# EAGLE board satshakit-grbl (EAGLE 8.4.3)
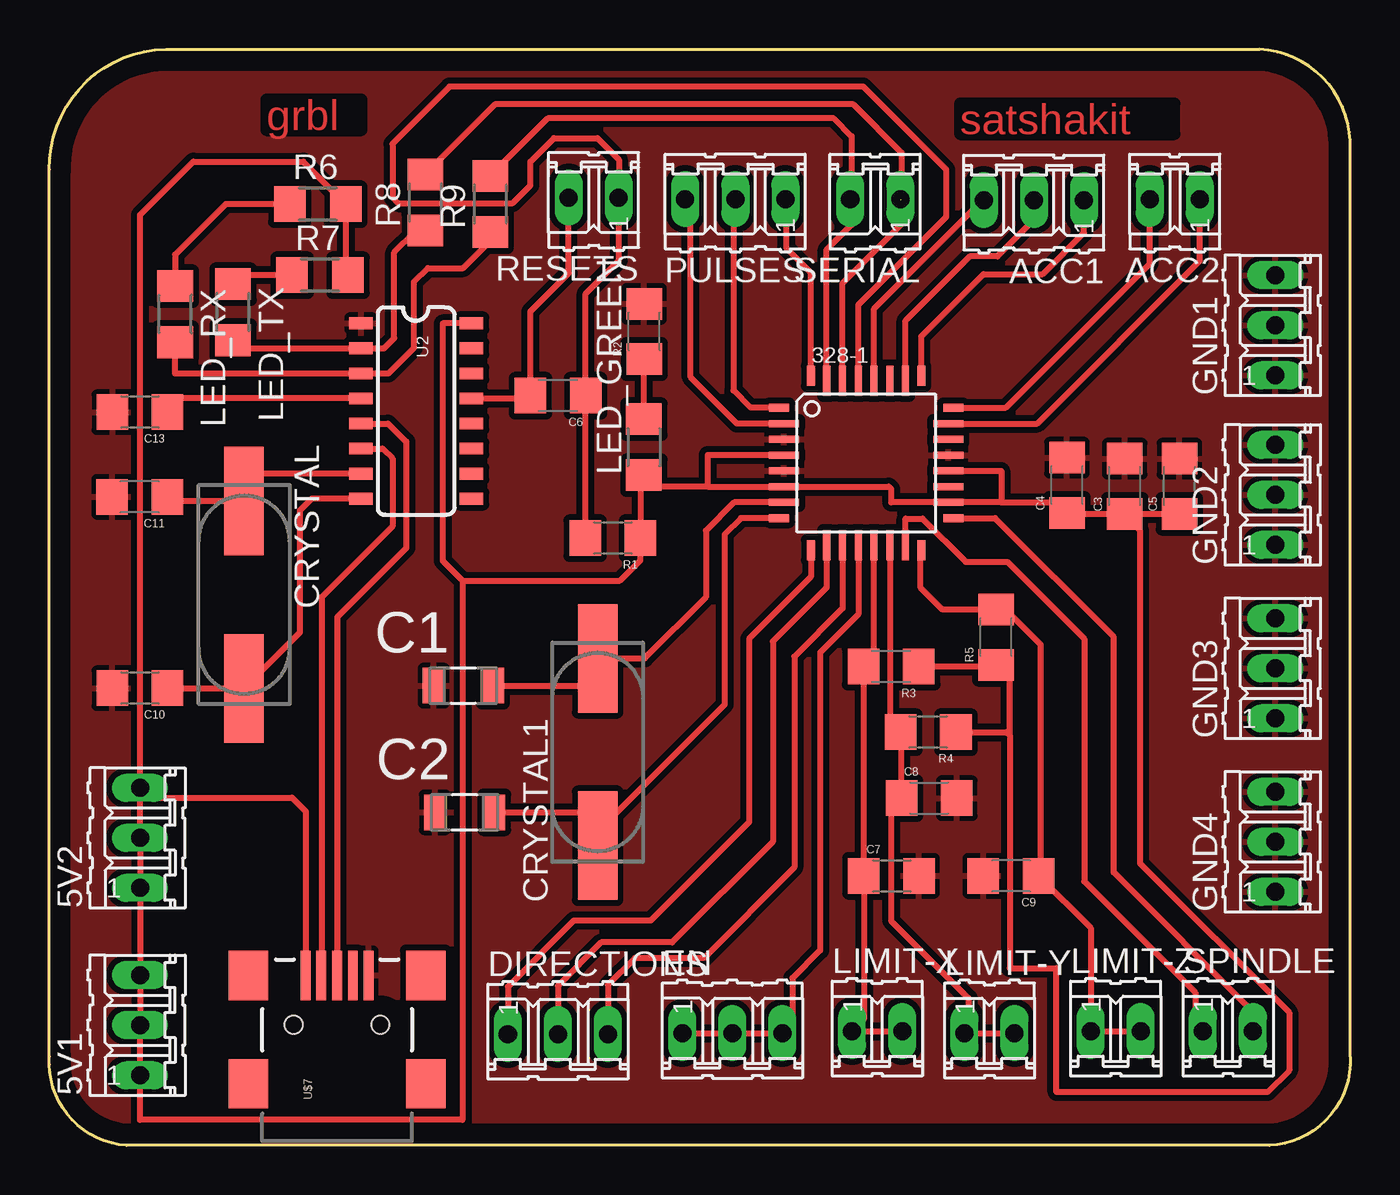
[diagram p0: board, top side]

Size 66.01 x 55.6 mm. Coordinates in mm from the lower left corner, seen from the top.
Outline: 3.91,0 arc-90 0.01,4.5 0.01,49.5 arc-90 5.91,55.6 61.41,55.6 arc-90 66.01,50.5 66.01,4.5 arc-90 61.91,0 3.91,0
Copper layers (1*16): Top 0.035mm / dielectric 1.5mm / Bottom 0.035mm
Design rules "default": minimum track width 10mil, minimum drill 24mil, track to track 8mil, track to pad 8mil, pad to pad 8mil, via to via 8mil, smd to smd 8mil, copper to edge 40mil, drill to drill 8mil, minimum pad ring 10mil, minimum via ring 8mil, stop-mask expansion 4mil, vias tented up to drill 0mil, thermal gap 10mil
tKeepout: 8 lines
bKeepout: 8 lines

## Footprints (pad centres in the part's own frame; a part is rotated, then mirrored left to right if it is on the bottom)
03P = drill 0.914 long: 1 -2.54,0; 2 0,0; 3 2.54,0
TQFP32-08 = smd 1.016 x 0.406: 1 -4.42,2.8; 8 -4.42,-2.8; 17 4.42,-2.8; 24 4.42,2.8 | smd 1.524 x 0.356: 2 -4.166,2; 3 -4.166,1.2; 4 -4.166,0.4; 5 -4.166,-0.4; 6 -4.166,-1.2; 7 -4.166,-2; 18 4.166,-2; 19 4.166,-1.2; 20 4.166,-0.4; 21 4.166,0.4; 22 4.166,1.2; 23 4.166,2 | smd 0.406 x 1.016: 9 -2.8,-4.42; 16 2.8,-4.42; 25 2.8,4.42; 32 -2.8,4.42 | smd 0.356 x 1.524: 10 -2,-4.166; 11 -1.2,-4.166; 12 -0.4,-4.166; 13 0.4,-4.166; 14 1.2,-4.166; 15 2,-4.166; 26 2,4.166; 27 1.2,4.166; 28 0.4,4.166; 29 -0.4,4.166; 30 -1.2,4.166; 31 -2,4.166
02P = drill 0.914 long: 1 -1.27,0; 2 1.27,0
CAPC3216X178N = smd 1.118 x 1.803: 1 -1.499,0; 2 1.499,0
1206 = smd 1.6 x 1.8: 1 -1.4,0; 2 1.4,0
CSM-7X-DU = smd 5.5 x 2: 1 -4.75,0; 2 4.75,0
1206' = smd 1.6 x 1.803: 1 -1.422,0; 2 1.422,0
LED1206 = smd 1.6 x 1.803: 1 -1.422,0; 2 1.422,0
R1206 = smd 1.6 x 1.803: 1 -1.422,0; 2 1.422,0
SO016 = smd 0.6 x 1.2: 1 -4.445,-2.8; 2 -3.175,-2.8; 3 -1.905,-2.8; 4 -0.635,-2.8; 5 0.635,-2.8; 6 1.905,-2.8; 7 3.175,-2.8; 8 4.445,-2.8; 9 4.445,2.8; 10 3.175,2.8; 11 1.905,2.8; 12 0.635,2.8; 13 -0.635,2.8; 14 -1.905,2.8; 15 -3.175,2.8; 16 -4.445,2.8
USB-MINIB = smd 2.5 x 0.5: D+ 2.5,0; D- 2.5,0.8; GND 2.5,-1.6; ID 2.5,-0.8; VBUS 2.5,1.6 | smd 2.5 x 2: MTN1 -3,4.5; MTN2 2.5,4.5; MTN3 -3,-4.5; MTN4 2.5,-4.5 | hole 0.9: 0,2.2; 0,-2.2

## Placement (x,y rotation side)
5V1  [03P]  4.61,6.1 90 top
5V2  [03P]  4.61,15.6 90 top
328-1  ATMEGA328P-AU  [TQFP32-08]  41.45,34.62 0 top
ACC1  [03P]  49.96,47.95 180 top
ACC2  [02P]  57.11,48 180 top
C1  18pF  [CAPC3216X178N]  21.01,23.32 0 top
C2  18pF  [CAPC3216X178N]  21.07,16.9 0 top
C3  10uF  [1206]  54.57,33.44 90 top
C4  1uF  [1206]  51.64,33.49 90 top
C5  100nF  [1206]  57.35,33.44 90 top
C6  100nF  [1206]  25.81,38.04 180 top
C7  100nF  [1206]  42.73,13.67 0 top
C8  100nF  [1206]  44.64,17.61 0 top
C9  100nF  [1206]  48.8,13.68 180 top
C10  18pF  [1206]  4.61,23.2 180 top
C11  18pF  [1206]  4.59,32.9 180 top
C13  10nF  [1206]  4.61,37.2 180 top
CRYSTAL  12MHZ  [CSM-7X-DU]  9.89,27.93 270 top
CRYSTAL1  16Mhz  [CSM-7X-DU]  27.83,19.95 90 top
DIRECTIONS  [03P]  25.81,5.65 0 top
EN  [03P]  34.66,5.7 0 top
GND1  [03P]  62.21,41.6 90 top
GND2  [03P]  62.21,33 90 top
GND3  [03P]  62.21,24.2 90 top
GND4  [03P]  62.21,15.4 90 top
LED_GREEN  [1206']  30.17,35.42 90 top
LED_RX  YELLOW  [LED1206]  6.39,42.16 270 top
LED_TX  YELLOW  [LED1206]  9.33,42.26 270 top
LIMIT-X  [02P]  42.01,5.8 0 top
LIMIT-Y  [02P]  47.71,5.7 0 top
LIMIT-Z  [02P]  54.11,5.8 0 top
PULSES  [03P]  34.81,48 180 top
R1  10k  [1206]  28.59,30.8 180 top
R2  499  [1206]  30.19,41.29 90 top
R3  4.7K  [1206]  42.72,24.28 180 top
R4  4.7K  [1206]  44.6,20.97 180 top
R5  4.7K  [1206]  48.04,25.78 90 top
R6  2K7  [R1206]  13.62,47.75 0 top
R7  2K7  [R1206]  13.74,44.15 0 top
R8  1K  [R1206]  19.07,47.84 90 top
R9  1K  [R1206]  22.37,47.75 90 top
RESETS  [02P]  27.62,48.08 180 top
SERIAL  [02P]  41.91,48 180 top
SPINDLE  [02P]  59.81,5.8 0 top
U2  CH340G  [SO016]  18.62,37.25 270 top
U$7  USB-MINIB-5PIN  [USB-MINIB]  14.6,6.13 90 top

## Library data of the parts
5V1 5V2 ACC1 ACC2 DIRECTIONS EN GND1-GND4 LIMIT-X LIMIT-Y LIMIT-Z PULSES RESETS SERIAL SPINDLE = con-amp-quick; OC_FARNELL: unknown; OC_NEWARK: unknown
328-1 = atmega8
C1 C2 = AVX_By_element14_Batch_1; MPN: 0612ZC225MAT2A; OC_FARNELL: -; OC_NEWARK: 12N3209; SUPPLIER: AVX; TOLERANCE: ±20%; VOLTAGERATING: 10V
C3-C11 C13 R1-R5 = 01_SparkFun
CRYSTAL = flight_controller.lbr01_FAB_Hello; OC_FARNELL: unknown; OC_NEWARK: unknown
CRYSTAL1 = 01_FAB_Hello; OC_FARNELL: unknown; OC_NEWARK: unknown
LED_GREEN = 01_FAB_Hello
LED_RX LED_TX R6-R9 = fab
U2 = SparkFun-DigitalIC; PROD_ID: IC-13498
U$7 = SparkFun

## Nets
5V: 5V1.1 5V1.2 5V1.3 5V2.1 5V2.2 5V2.3 328-1.4 328-1.6 328-1.18 328-1.20 C3.1 C4.1 C5.1 LED_GREEN.1 R1.1 R3.1 R4.1 R5.1 R6.2 R7.2 U2.16 U$7.VBUS
ABORT: 328-1.23 ACC2.1
COOLANT: 328-1.26 ACC1.2
DIRECTION-X: 328-1.9 DIRECTIONS.1
DIRECTION-Y: 328-1.10 DIRECTIONS.2
DIRECTION-Z: 328-1.11 DIRECTIONS.3
EN: 328-1.12 EN.1 EN.2 EN.3
FEEDHOLD: 328-1.24 ACC2.2
GND: 328-1.3 328-1.5 328-1.21 C1.1 C2.1 C3.2 C4.2 C5.2 C7.2 C8.2 C9.2 C10.2 C11.2 C13.2 GND1.1 GND1.2 GND1.3 GND2.1 GND2.2 GND2.3 GND3.1 GND3.2 GND3.3 GND4.1 GND4.2 GND4.3 R2.2 U2.1 U$7.GND
LIMIT-X: 328-1.13 C7.1 LIMIT-X.1 LIMIT-X.2 R3.2
LIMIT-Y: 328-1.14 C8.1 LIMIT-Y.1 LIMIT-Y.2 R4.2
LIMIT-Z: 328-1.16 C9.1 LIMIT-Z.1 LIMIT-Z.2 R5.2
N$1: U2.5 U$7.D+
N$2: 328-1.7 C1.2 CRYSTAL1.2
N$3: U2.6 U$7.D-
N$7: LED_RX.1 R6.1
N$8: LED_TX.1 R7.1
N$9: 328-1.8 C2.2 CRYSTAL1.1
N$26: LED_GREEN.2 R2.1
OSC_IN: C10.1 CRYSTAL.2 U2.8
OSC_OUT: C11.1 CRYSTAL.1 U2.7
PROBE: 328-1.28 ACC1.3
PULSE-X: 328-1.32 PULSES.1
PULSE-Y: 328-1.1 PULSES.2
PULSE-Z: 328-1.2 PULSES.3
RST: 328-1.29 C6.1 R1.2 RESETS.1
RST-FTDI: C6.2 RESETS.2 U2.13
RX-340: 328-1.31 R9.2 SERIAL.2
RXD: LED_RX.2 R9.1 U2.3
SPINDLE: 328-1.15 SPINDLE.1
SPINDLE-DIR: 328-1.17 SPINDLE.2
START-RESUME: 328-1.25 ACC1.1
TX-340: 328-1.30 R8.2 SERIAL.1
TXD: LED_TX.2 R8.1 U2.2
V3: C13.1 U2.4

## Tracks (layer width: path | path; a pad name or v marks a point on that pad's centre or on a via)
5V
  Top 0.254: 328-1.20 45,34.22 45,34.24
  Top 0.305: 328-1.18 | 328-1.20 | 45.61,32.59 328-1.18 | 328-1.20 45,34.24 | 37.97,33.42 328-1.6 | 328-1.18 42.72,32.62 42.72,33.3 42.6,33.42 328-1.6 | R3.1 47.84,24.28 R5.1 48.74,23.68 48.74,20.8 | R4.1 48.57,20.97 48.74,20.8 | 48.74,20.8 48.74,9 51.11,9 51.11,2.7 61.81,2.7 62.91,3.8 62.91,6.75 55.36,14.3 55.36,31.18 54.48,32.06 | 33.41,33.42 328-1.6 | 33.41,33.42 30.17,33.42 LED_GREEN.1 29.99,34 R1.1 29.99,29.68 28.96,28.65 20.96,28.65 | R6.2 15.09,47.7 | R6.2 15.05,44.26 R7.2 | R6.2 12.89,49.9 7.31,49.9 4.61,47.2 5V2.3 | U2.16 19.96,41.7 19.96,29.65 20.96,28.65 | 53.82,32.09 C3.1 | 54.22,31.69 C3.1 | 20.96,28.65 20.96,1.3 4.61,1.3 5V1.1 5V1.2 5V1.3 5V2.1 5V2.2 5V2.3 | U$7.VBUS 13.01,8.43 13.01,16.95 12.32,17.64 5.11,17.64 5V2.3 | 328-1.4 33.41,35.02 33.41,33.42 | 54.48,32.06 54.32,32.09 | 54.48,32.06 C3.1 | C3.1 C5.1 | C3.1 51.69,32.04 C4.1 51.11,32.62 48.31,32.62 | 48.31,32.62 328-1.18 | 328-1.20 48.31,34.22 48.31,32.62
ABORT
  Top 0.305: 328-1.23 50.13,36.62 58.38,44.87 ACC2.1
COOLANT
  Top 0.305: 328-1.26 43.45,41.84 46.71,45.1 48.11,45.1 49.96,46.95 ACC1.2
DIRECTION-X
  Top 0.305: 328-1.9 38.65,28.84 35.51,25.7 35.51,16.4 30.51,11.4 26.61,11.4 23.27,8.06 DIRECTIONS.1
DIRECTION-Y
  Top 0.305: 328-1.10 39.45,28.3 36.71,25.56 36.71,15.4 31.61,10.3 28.01,10.3 25.81,8.1 DIRECTIONS.2
DIRECTION-Z
  Top 0.305: 328-1.11 40.25,27.24 37.81,24.8 37.81,14.1 33.21,9.5 29.71,9.5 28.35,8.14 DIRECTIONS.3
EN
  Top 0.305: 41.07,30.45 328-1.12 41.05,26.94 39.11,25 39.11,9.9 37.7,8.49 37.7,6.2 EN.3 EN.2 EN.1
FEEDHOLD
  Top 0.305: 328-1.24 48.53,37.42 55.84,44.73 ACC2.2
GND
  Top 0.305: 328-1.5 | 328-1.21
  pour Top (isolate 0.305): 0.01,4.5 0.01,49.5 arc-90 5.01,55.6 62.01,55.6 arc-90 66.01,50.5 66.01,4.5 arc-90 61.81,0 3.81,0 arc-90
LIMIT-X
  Top 0.305: 328-1.13 41.85,24.28 R3.2 41.33,24.27 41.33,13.8 | 41.33,13.7 41.33,13.8 | 41.33,13.7 C7.1 41.33,6.39 LIMIT-X.1 LIMIT-X.2 | 41.94,13.19 41.33,13.8 | 41.54,13.49 41.33,13.7 | 41.24,13.61 41.33,13.7
LIMIT-Y
  Top 0.305: C8.1 43.24,20.93 R4.2 42.65,21.52 328-1.14 | 42.91,17.28 C8.1 | C8.1 42.71,17.08 42.71,11.4 46.64,7.47 46.64,5.9 LIMIT-Y.1 LIMIT-Y.2
LIMIT-Z
  Top 0.305: 328-1.16 44.21,30.16 44.21,28.3 45.33,27.18 R5.2 48.53,27.18 50.31,25.4 50.31,13.79 C9.1 52.84,11.03 LIMIT-Z.1 LIMIT-Z.2
N$1
  Top 0.305: U2.5 17.19,36.62 18.11,35.7 18.11,30.3 14.61,26.8 14.61,8.43 U$7.D+
N$2
  Top 0.305: 37.28,32.59 328-1.7 34.75,32.62 33.32,31.19 33.32,27.81 30.21,24.7 CRYSTAL1.2 27.83,23.32 C1.2
N$3
  Top 0.305: U2.6 16.91,35.35 17.41,34.85 17.41,31.4 13.81,27.8 13.81,8.43 U$7.D-
N$7
  Top 0.305: LED_RX.1 6.39,45.18 8.96,47.75 R6.1
N$8
  Top 0.305: R7.1 9.79,44.15 LED_TX.1
N$9
  Top 0.305: 328-1.8 35.09,31.82 34.27,31 34.27,22.36 27.83,15.92 | 27.01,13.89 27.01,15.1 27.56,15.65 27.83,15.38 CRYSTAL1.1 27.83,15.92 | C2.2 27.83,16.9 27.83,15.92
N$26
  Top 0.305: LED_GREEN.2 30.17,39.89 R2.1
OSC_IN
  Top 0.305: CRYSTAL.2 9.87,23.2 | U2.8 13.32,32.81 12.71,32.2 12.71,26.01 CRYSTAL.2 | C10.1 9.87,23.2 | 9.87,23.2 CRYSTAL.2
OSC_OUT
  Top 0.305: U2.7 10.19,34.08 10.01,33.9 10.01,32.81 CRYSTAL.1 | 9.67,32.9 CRYSTAL.1 | CRYSTAL.1 5.99,32.68 C11.1
PROBE
  Top 0.305: 328-1.28 41.85,42.44 47.36,47.95 ACC1.3
PULSE-X
  Top 0.305: 328-1.32 38.65,44.26 37.41,45.5 37.41,47.94 PULSES.1
PULSE-Y
  Top 0.305: 328-1.1 35.59,37.42 34.71,38.3 34.71,47.63 34.81,47.73 PULSES.2
PULSE-Z
  Top 0.305: 328-1.2 34.89,36.62 32.54,38.97 32.54,47.73 PULSES.3
RST
  Top 0.305: R1.2 27.21,30.82 C6.1 27.21,43.2 28.89,44.88 RESETS.1 28.91,48.1 28.91,50 27.81,51.1 25.61,51.1 24.41,49.9 24.41,48.7 23.51,47.8 17.71,47.8 17.41,48.1 17.41,50.8 20.31,53.7 41.31,53.7 45.51,49.5 45.51,47.1 41.05,42.64 328-1.29
RST-FTDI
  Top 0.305: U2.13 24.41,37.89 C6.2 24.41,42.3 26.35,44.24 RESETS.2
RX-340
  Top 0.305: R9.2 25.29,52.1 39.81,52.1 40.71,51.2 40.71,48.07 SERIAL.2 40.64,46.67 40.66,46.65 | 40.66,46.65 40.71,46.7 | 40.66,46.65 39.45,45.44 328-1.31
RXD
  Top 0.305: LED_RX.2 6.39,39.16 U2.3 17.22,39.16 18.51,40.45 18.51,43.8 19.21,44.5 21.01,44.5 22.37,45.86 R9.1 22.37,45.76
SPINDLE
  Top 0.305: 328-1.15 43.45,31.8 44.31,31.8 46.51,29.6 48.61,29.6 52.51,25.7 52.51,13.4 58.14,7.77 58.14,6.2 SPINDLE.1
SPINDLE-DIR
  Top 0.305: 328-1.17 47.99,31.82 54.01,25.8 54.01,13.85 61.08,6.78 SPINDLE.2
START-RESUME
  Top 0.305: 328-1.25 44.25,41.04 47.41,44.2 50.41,44.2 52.5,46.29 ACC1.1
TX-340  (1 unrouted)
  Top 0.305: R8.2 22.61,52.8 40.81,52.8 43.25,50.36 43.25,48.07 SERIAL.1 | 43.21,47.96 43.21,46.7 40.25,43.74 328-1.30
TXD
  Top 0.305: R8.1 19.07,46.3 18.51,46.3 17.51,45.3 17.51,40.95 16.99,40.43 U2.2 9.33,40.43 LED_TX.2
V3
  Top 0.305: U2.4 6.01,37.89 C13.1

## Text on the board
Top: grbl | satshakit